# EAGLE board TamaCollar1 Mk1 PCB v58 (EAGLE 9.7.0)
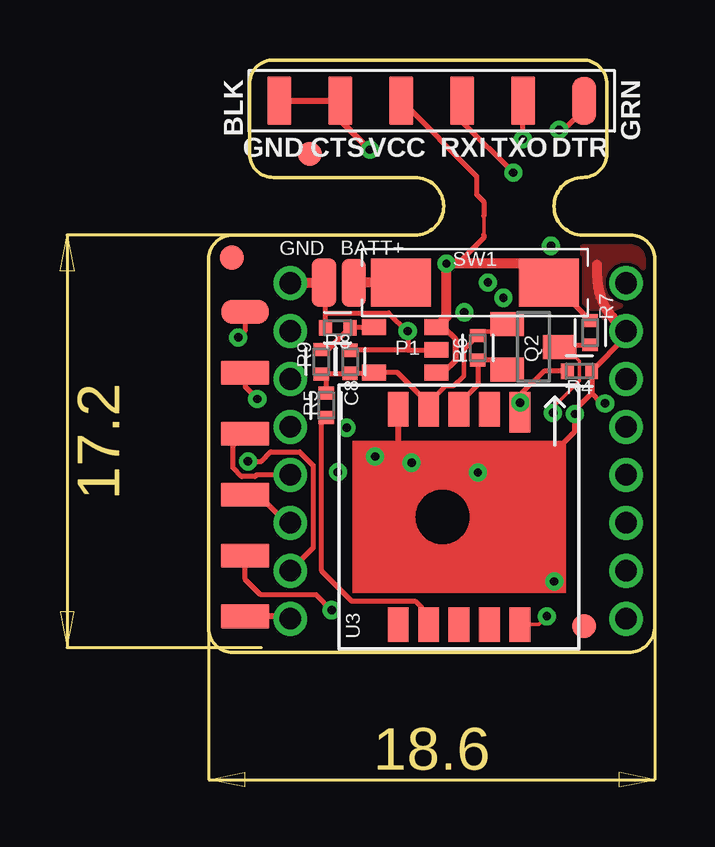
[diagram p0: board, top side]
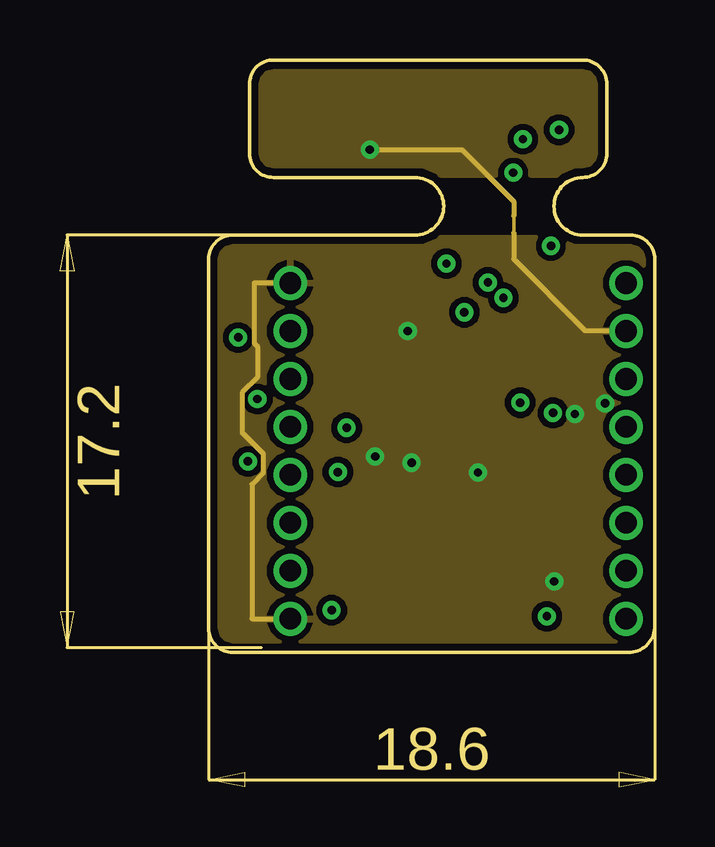
[diagram p1: board, inner layer Route2]
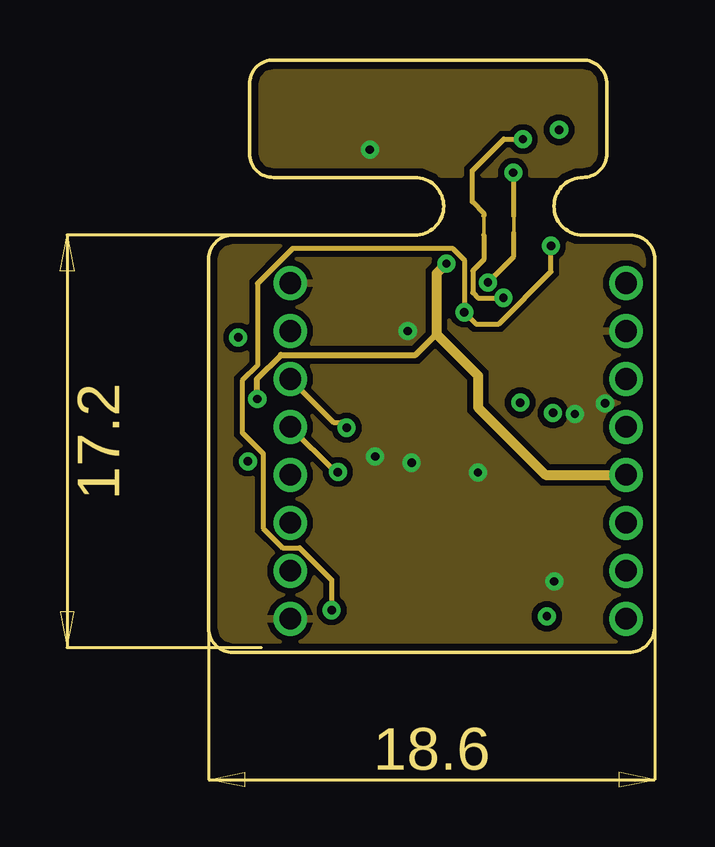
[diagram p2: board, inner layer Route15]
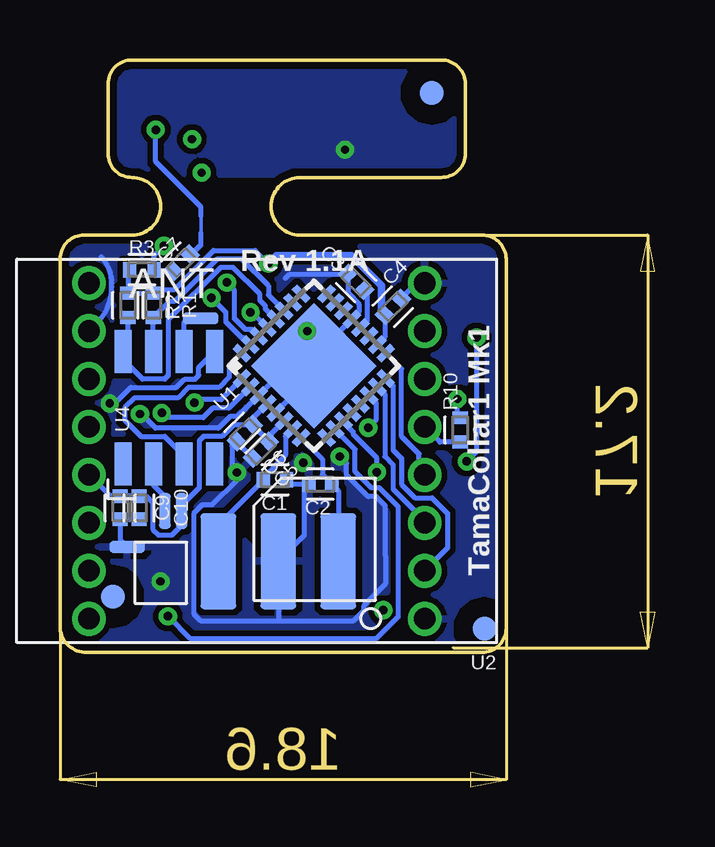
[diagram p3: board, bottom side, seen from below]

Size 18.6 x 24.7 mm. Coordinates in mm from the lower left corner, seen from the top.
Outline: 17.6,17.4 arc-90 18.6,16.4 18.6,1.2 arc-90 17.6,0 2.2,0 1,0 arc-90 0,1 0,16.4 arc-90 1,17.4 2.2,17.4 8.6,17.4 arc90 9.8,18.6 arc90 8.6,19.8 2.7,19.8 arc-90 1.7,20.8 1.7,23.7 arc-90 2.7,24.7 15.6,24.7 arc-90 16.6,23.7 16.6,20.8 arc-90 15.6,19.8 arc90 14.4,18.6 arc90 15.6,17.4 17.6,17.4
Copper layers (1+2*15+16): Top 0.035mm / dielectric 0.12mm / Route2 0.035mm / dielectric 1.165mm / Route15 0.035mm / dielectric 0.12mm / Bottom 0.035mm
Design rules "LionCircuits(4_Layer)": minimum track width 6mil, minimum drill 0.35mm, track to track 6mil, track to pad 6mil, pad to pad 6mil, via to via 6mil, smd to smd 6mil, copper to edge 12mil, drill to drill 12mil, minimum pad ring 10mil, minimum via ring 8mil, stop-mask expansion 0.05mm, vias tented up to drill 0.4mm, thermal gap 10mil

## Footprints (pad centres in the part's own frame; a part is rotated, then mirrored left to right if it is on the bottom)
BREAKOUT_PAD*1*1X2MM = smd 2 x 1: P$1 0,0
CAPC1005X60 = smd 0.56 x 0.629: 1 -0.485,0; 2 0.485,0
FIDUCIAL_1MM = smd 1 x 1: 1 0,0
FTDI_DEVICE_SMD = smd 1 x 2: P1 -6.35,0; P2 -3.81,0; P3 -1.27,0; P4 1.27,0; P5 3.81,0; P6 6.35,0
1X6-THT = smd 1 x 2: P1 -6.35,0; P2 -3.81,0; P3 -1.27,0; P4 1.27,0; P5 3.81,0; P6 6.35,0
MIC5205 = smd 0.66 x 1: 1 0.95,1.3; 2 0,1.3; 3 -0.95,1.3; 4 -0.95,-1.3; 5 0.95,-1.3
RESONATOR_4MHZ = smd 1.5 x 4: A -2.5,0; B 0,0; C 2.5,0
SOT23 = smd 1 x 1.4: 1 -0.95,-1.1; 2 0.95,-1.1; 3 0,1.1
RESC1005X40 = smd 0.535 x 0.644: 1 -0.507,0; 2 0.507,0
BREAKOUT_PAD*1*0.5X1.5MM = smd 1.5 x 0.5: P$1 0,0
REED_CT05 = smd 2.5 x 2: P1 -3.08,0; P2 3.08,0
QFN32_5X5_0.50 = smd 0.8 x 0.3: 1 -2.5,1.75; 2 -2.5,1.25; 3 -2.5,0.75; 4 -2.5,0.25; 5 -2.5,-0.25; 6 -2.5,-0.75; 7 -2.5,-1.25; 8 -2.5,-1.75; 17 2.5,-1.75; 18 2.5,-1.25; 19 2.5,-0.75; 20 2.5,-0.25; 21 2.5,0.25; 22 2.5,0.75; 23 2.5,1.25; 24 2.5,1.75 | smd 0.3 x 0.8: 9 -1.75,-2.5; 10 -1.25,-2.5; 11 -0.75,-2.5; 12 -0.25,-2.5; 13 0.25,-2.5; 14 0.75,-2.5; 15 1.25,-2.5; 16 1.75,-2.5; 25 1.75,2.5; 26 1.25,2.5; 27 0.75,2.5; 28 0.25,2.5; 29 -0.25,2.5; 30 -0.75,2.5; 31 -1.25,2.5; 32 -1.75,2.5 | smd 3.7 x 3.7: EXP 0,0
LORA_RFM95W-915S2_16STANDOFFMODULE = drill 0.9: PH1 -7,7; PH2 -7,5; PH3 -7,3; PH4 -7,1; PH5 -7,-1; PH6 -7,-3; PH7 -7,-5; PH8 -7,-7; PH9 7,-7; PH10 7,-5; PH11 7,-3; PH12 7,-1; PH13 7,1; PH14 7,3; PH15 7,5; PH16 7,7
ORG1411 = smd 1.676 x 0.864: P1 4.362,-2.54 | smd 1.422 x 0.864: P2 4.489,-1.27; P3 4.489,0; P4 4.489,1.27; P5 4.489,2.54; P6 -4.489,2.54; P7 -4.489,1.27; P8 -4.489,0; P9 -4.489,-1.27; P10 -4.489,-2.54
DS3231MZ+_SOIC8 = smd 1.78 x 0.72: P1 -2.34,1.905; P2 -2.34,0.635; P3 -2.34,-0.635; P4 -2.34,-1.905; P5 2.34,-1.905; P6 2.34,-0.635; P7 2.34,0.635; P8 2.34,1.905

## Placement (x,y rotation side)
BATT+  BREAKOUT_PADL  [BREAKOUT_PAD*1*1X2MM]  6.05,15.41 90 top
C1  10pF  [CAPC1005X60]  9.64,7.2 180 bottom
C2  10pF  [CAPC1005X60]  7.75,7.01 0 bottom
C3  0.1uF  [CAPC1005X60]  6.26,15.45 315 bottom
C4  0.1uF  [CAPC1005X60]  4.72,14.41 45 bottom
C5  0.1uF  [CAPC1005X60]  10.22,8.44 225 bottom
C6  0.1uF  [CAPC1005X60]  10.9,9.15 225 bottom
C7  0.1uF  [CAPC1005X60]  13.53,16.25 45 bottom
C8  2.2uF  [CAPC1005X60]  5.9,12.12 270 top
C9  0.1uF  [CAPC1005X60]  16.09,6.03 270 bottom
C10  0.1uF  [CAPC1005X60]  15.31,6.03 270 bottom
F1  FIDUCIAL  [FIDUCIAL_1MM]  15.66,1.09 0 top
F2  FIDUCIAL  [FIDUCIAL_1MM]  4.21,20.78 0 top
F3  FIDUCIAL  [FIDUCIAL_1MM]  0.97,16.46 0 top
F4  FIDUCIAL  [FIDUCIAL_1MM]  16.39,2.33 0 bottom
F5  FIDUCIAL  [FIDUCIAL_1MM]  0.9,0.99 0 bottom
F6  FIDUCIAL  [FIDUCIAL_1MM]  3.1,23.32 0 bottom
GND  BREAKOUT_PADL  [BREAKOUT_PAD*1*1X2MM]  4.81,15.42 90 top
JP1  FTDI_DEVICESMD  [FTDI_DEVICE_SMD]  9.3,23 180 top
JP2  AVR_SPI_PRG_61X6_THT  [1X6-THT]  1.52,7.85 270 top
P1  LDO_MIC5205YM5  [MIC5205]  8.2,12.62 270 top
Q1  RESONATOR_4MHZ  [RESONATOR_4MHZ]  9.5,3.8 0 bottom
Q2  NMOSFET  [SOT23]  13.54,12.74 270 top
R1  4.7k  [RESC1005X40]  14.71,14.47 270 bottom
R2  4.7k  [RESC1005X40]  15.76,14.47 270 bottom
R3  10k  [RESC1005X40]  15.19,15.96 0 bottom
R4  10k  [RESC1005X40]  15.46,11.73 0 top
R5  10k  [RESC1005X40]  4.9,10.3 270 top
R6  10k  [RESC1005X40]  11.22,12.7 90 top
R7  10k  [RESC1005X40]  15.91,13.33 90 top
R8  10k  [RESC1005X40]  5.38,13.54 180 top
R9  22k  [RESC1005X40]  4.7,12.12 270 top
R10  10k  [RESC1005X40]  1.91,9.28 270 bottom
RTC1  BREAKOUT_PADS  [BREAKOUT_PAD*1*0.5X1.5MM]  12.74,13.93 0 bottom
RTC2  BREAKOUT_PADS  [BREAKOUT_PAD*1*0.5X1.5MM]  14.23,5.9 90 bottom
RTC3V3  BREAKOUT_PADS  [BREAKOUT_PAD*1*0.5X1.5MM]  13.53,5.9 270 bottom
RTCGND  BREAKOUT_PADS  [BREAKOUT_PAD*1*0.5X1.5MM]  15.8,4.4 0 bottom
SW1  REED_SWITCH  [REED_CT05]  11.1,15.42 0 top
U1  ATMEGA328P-MU  [QFN32_5X5_0.50]  8.02,11.95 45 bottom
U2  LORA_RFM95W-915S2_MODULETHT  [LORA_RFM95W-915S2_16STANDOFFMODULE]  10.4,8.4 180 bottom
U3  GPS_ORG1411  [ORG1411]  10.44,5.65 90 top
U4  DS3231MZ+  [DS3231MZ+_SOIC8]  14.06,10.2 90 bottom

## Library data of the parts
BATT+ F1-F6 GND JP1 JP2 Q1 RTC1 RTC2 RTC3V3 RTCGND SW1 U3 = CDC Library
C1 C2 = Capacitor; CATEGORY: Capacitor; LINK: https://www.evelta.com/10-pf-50v-0402-smd-multilayer-ceramic-capacitors-cc0402jrnpo9bn100-yageo/
C3-C7 C9 C10 = Capacitor; CATEGORY: Capacitor; LINK: https://www.evelta.com/100-nf-25v-0402-smd-multi-layer-ceramic-capacitor-0402x104k250ct-walsin/
C8 = Capacitor; CATEGORY: Capacitor; LINK: https://www.comkey.in/passive-components/capacitors/0402x225m6r3ct
P1 = CDC Library; LINK: https://www.digikey.in/en/products/detail/texas-instruments/TPS7A0318DBVR/13535534
Q2 = Transistor; CATEGORY: Transistor; LINK: https://www.evelta.com/bss138lt1g-50v-220ma-n-channel-transistor-surface-mount-sot-23-3/; SUB-CATEGORY: MOSFET; TYPE: N-Channel
R1 R2 = Resistor; CATEGORY: Resistor; LINK: https://www.evelta.com/4-7k-1-0402-smd-thick-film-chip-resistor-royal-ohm-0402wgf4701tce/; SUB-CATEGORY: Fixed
R3-R8 R10 = Resistor; CATEGORY: Resistor; LINK: https://www.evelta.com/10k-1-0402-smd-thick-film-chip-resistor-royal-ohm-0402wgf1002tce/; SUB-CATEGORY: Fixed
R9 = Resistor; CATEGORY: Resistor; LINK: https://www.evelta.com/22k-1-0402-smd-thick-film-chip-resistor-royal-ohm-0402wgf2202tce/; SUB-CATEGORY: Fixed
U1 = CDC Library; LINK: https://www.rhydolabz.com/components-microcontrollers-c-172_192/atmega328pmu-smd-p-2612.html
U2 = CDC Library; LINK: https://www.digikey.in/product-detail/en/rf-solutions/RFM95W-915S2/RFM95W-915S2-ND/6564923
U4 = CDC Library; LINK: https://www.evelta.com/ds3231mz-maxim-integrated-alarm-rtc-i2c-2-3-v-to-5-5-v/

## Nets
+1.8V [Power]: C8.2 P1.5 Q2.1 R5.1 R6.2 R9.2 U3.P4
+3.3V [Power]: C4.1 C5.1 C6.1 C9.1 C10.1 JP1.P4 JP2.P2 P1.1 P1.3 R1.1 R2.1 R3.1 R7.2 R10.1 RTC3V3.P$1 SW1.P2 U1.4 U1.6 U1.18 U2.PH13
+BATT [Power]: BATT+.P$1 SW1.P1
AREF: C3.2 U1.20
CS_LR: R10.2 U1.11 U2.PH5
DTR: C7.2 JP1.P1
GND [Power]: C1.1 C2.1 C3.1 C4.2 C5.2 C6.2 C8.1 C9.2 C10.2 GND.P$1 JP1.P5 JP1.P6 JP2.P6 P1.2 Q1.B R4.2 R8.2 RTCGND.P$1 U1.3 U1.5 U1.21 U1.EXP U2.PH1 U2.PH8 U2.PH10 U3.P5 U4.P5
GPS_CTS: R5.2 U3.P7
GPS_EN: R4.1 U1.1 U3.P1
GPS_RX: U1.10 U3.P10
GPS_TX18: Q2.2 R6.1 U3.P3
GPS_TX33: Q2.3 R7.1 U1.2
INT0: U1.32 U4.P3
LR_ANT [RF]: U2.PH9
MISO: JP2.P1 U1.16 U2.PH2
MOSI: JP2.P4 U1.15 U2.PH3
P1ADJ [Power]: P1.4 R8.1 R9.1
Q1: C1.2 Q1.A U1.7
Q2: C2.2 Q1.C U1.8
RESET_LR: U1.14 U2.PH6
RST: C7.1 JP2.P5 R3.2 U1.29
RTCVBAT: RTC1.P$1 U4.P6
RTCVCC: RTC2.P$1 U4.P2
RXD: JP1.P3 U1.30
SCK: JP2.P3 U1.17 U2.PH4
SCL: R2.2 U1.28 U4.P8
SDA: R1.2 U1.27 U4.P7
TXD: JP1.P2 U1.31

## Tracks (layer width: path | path; a pad name or v marks a point on that pad's centre or on a via)
+1.8V
  Top 0.18: 9.17,10.4 9.87,11.1 10.21,11.1 10.65,11.53 10.65,12.64 R6.2 11.38,13.37 11.88,13.37 12.32,13.81 Q2.1
  Top 0.2: R5.1 4.9,11.41 R9.2 5.88,11.61 C8.2 6.87,11.63 P1.5 7.87,11.67 9.17,10.37 U3.P4 9.17,10.4
+3.3V  (via drill 0.35)
  Top 0.152: 11.48,18.2 11.48,17.4
  Top 0.2: 9.74,11.67 P1.1 | P1.3 9.74,13.57 | R7.2 14.33,15.42 SW1.P2 13.39,16.21 | v9.91,16.21 10.4,16.21 11.48,17.29 11.48,17.4 | 11.48,18.2 11.48,18.8 11.17,19.11 11.17,19.86 JP1.P4 | JP2.P2 1.52,11.08 v2.03,10.57
  Top 0.254: 9.74,13.57 9.78,13.57 10.28,13.07 10.28,12.17 9.78,11.67 9.74,11.67
  Top 0.406: P1.3 9.91,13.98 v9.91,16.21 13.39,16.21
  Route15 0.254: v2.03,10.57 2,10.6 2,11.39 3.01,12.4 8.63,12.4 9.5,13.27
  Route15 0.406: U2.PH13 14.04,7.4 11.23,10.21 11.23,11.54 9.5,13.27 9.5,15.8 v9.91,16.21
  Bottom 0.2: U1.18 5.06,13.14 C4.1 | R3.1 15.76,15.89 R2.1 R1.1 14.56,15.13 13.83,15.13 12.2,16.76 10.46,16.76 v9.91,16.21 | U2.PH13 16.52,6.51 C9.1 C10.1 15.01,6.51 14.73,6.24 14.73,5.13 14.5,4.9 13.93,4.9 13.53,5.3 RTC3V3.P$1 13.53,6.12 12.8,6.85 12.8,8.82 12.62,9 11.85,9 11.37,9.48 10.57,9.48 C6.1 | U1.6 9.78,9.13 9.78,8.89 C5.1 10.56,9.46 C6.1 | U1.4 10.56,9.77 C6.1 | R10.1 2.03,9.9 v2.03,10.57
  Bottom 0.305: C4.1 5.19,14.2 5.19,15.29 6.45,16.55 9.58,16.55 v9.91,16.21
+BATT
  Top 0.2: SW1.P1
  Top 0.406: SW1.P1 BATT+.P$1
AREF
  Bottom 0.2: C3.2 5.92,15.04 5.79,14.91 5.79,13.83 U1.20
CS_LR  (via drill 0.35)
  Route15 0.2: v5.39,7.52 5.28,7.52 U2.PH5
  Bottom 0.2: v5.39,7.52 5.41,7.54 5.41,8.13 6.38,9.11 6.38,9.19 6.78,9.59 U1.11 | R10.2 2.77,8.77 U2.PH5
DTR  (via drill 0.35)
  Top 0.2: v14.61,21.79 14.81,21.79 15.65,22.63 JP1.P1
  Bottom 0.152: 12.73,17.5 12.73,18.2
  Bottom 0.2: 12.73,18.2 12.73,18.57 14.61,20.46 v14.61,21.79 | C7.2 13.13,16.59 12.73,17 12.73,17.5
GND  (via drill 0.35)
  Top 0.2: P1.2 9.48,12.61 8.3,12.61 | 8.3,12.61 C8.1 | 4.87,14.15 4.87,15.36 GND.P$1 | 8.3,12.61 8.3,13.36 7.5,14.15 4.87,14.15 | 14.41,8.35 15.27,9.21 15.27,10.12 | 15.97,10.81 R4.2 17.4,13.16 U2.PH10 | 15.97,10.81 15.27,10.12 | v16.53,10.38 16.4,10.38 15.97,10.81 | 15.27,10.12 15.27,10.11 v15.27,9.94 | R8.2 4.87,14.15
  Top 0.254: U3.P5 7.9,8.47 v8.46,7.91 | U2.PH1 3.3,1.5 JP2.P6 | JP1.P6 JP1.P5 5.49,22.17 6.7,20.96 v6.72,20.96
  Top 0.406: U2.PH10 16.94,13.86 arc-45 16.2,15.65 16.2,16.16 | GND.P$1 4.79,15.4 U2.PH8
  Route2 0.152: 12.73,18.2 12.73,17.5
  Route2 0.2: U2.PH10 15.7,13.4 12.73,16.4 12.73,17.5 | 12.73,18.2 12.73,18.8 10.57,20.96 v6.72,20.96 | U2.PH8 1.9,15.4 1.9,12.89 2.03,12.76 2.03,11.46 1.4,10.83 1.4,9.16 2.27,8.29 2.27,7.48 1.8,7.01 1.8,1.4 U2.PH1
  Bottom 0.2: 9.7,10.01 U1.5 8.02,11.6 U1.EXP | U1.EXP 8.02,12.3 U1.21 6.14,14.18 6.14,14.53 6.6,14.99 C3.1 6.62,15.77 9.03,15.77 9.2,15.6 | U1.EXP 9.08,11.95 U1.3 11.2,9.83 11.52,9.83 12,9.36 14.62,9.36 15.21,9.94 v15.27,9.94 | C5.2 11.24,8.78 C6.2 11.44,8.62 11.44,7.71 v11.23,7.5 11.23,7.18 12.25,6.16 12.66,6.16 13,5.82 13,1.58 12.71,1.29 9.5,1.29 | 5.03,4.04 5.03,6.11 5.42,6.5 5.76,6.5 6.65,7.39 6.65,7.88 v6.94,8.17 | 5.04,4.04 5.03,4.04 | C10.2 C9.2 16.09,4.69 RTCGND.P$1 | C4.2 3.73,15.4 U2.PH8 | U2.PH10 17.06,13.74 arc-45 16.44,15.24 16.44,15.39 arc-45 16.9,16.5 | v16.53,10.38 16.32,10.38 15.66,11.04 13.75,11.04 13.4,11.4 12.96,11.4 12.82,11.54 12.82,11.88 U4.P5 | 5.03,4.04 5.03,2.85 5.95,1.94 5.95,1.74 6.39,1.29 9.5,1.29 | 9.5,1.29 Q1.B 8.41,4.89 8.41,6.83 C2.1 8.96,7.01 C1.1
  other vias: 14.41,2.96 8.3,13.4
  pour Route15 (isolate 0.254): 1,0 18.1,0 arc90 18.6,0.5 18.6,23.7 arc90 17.6,24.7 1.6,24.7 arc90 0,23.1 0,1 arc90
  pour Route2 (isolate 0.254): 1,0 17.9,0 arc90 18.6,0.7 18.6,23.7 arc90 17.6,24.7 1.6,24.7 arc90 0,23.1 0,1 arc90
  pour Bottom (isolate 0.254): 1,0 18.4,0 arc90 18.6,0.2 18.6,23.7 arc90 17.6,24.7 1.6,24.7 arc90 0,23.1 0,1 arc90
  pour Top: 15.5,17.4 15.5,14.5 16.9,13.1 18.2,13.1 18.5,13.4 18.5,17 18.1,17.4
GPS_CTS
  Top 0.2: U3.P7 9.17,1.57 8.6,2.14 5.96,2.14 4.71,3.39 4.71,9.6 R5.2
GPS_EN  (via drill 0.35)
  Top 0.2: 12.99,10.73 12.98,10.72 U3.P1 | R4.1 13.99,11.73 12.99,10.73 | v12.99,10.41 v12.99,10.42 12.99,10.73
  Bottom 0.2: U1.1 11.02,11.39 11.88,10.54 12.8,10.54 12.92,10.41 v12.99,10.41
GPS_RX  (via drill 0.35)
  Top 0.152: U3.P10 13.76,1.16 v14.1,1.5
  Bottom 0.2: U1.10 6.3,8.46 6.3,7.54 5.62,6.86 5.29,6.86 4.5,6.07 4.5,1.5 5.4,0.59 13.2,0.59 v14.1,1.5
GPS_TX18
  Top 0.2: Q2.2 12.06,12.19 R6.1 11.22,11.15 10.44,10.37 U3.P3
GPS_TX33  (via drill 0.35)
  Top 0.152: Q2.3 14.86,12.74 15.45,12.15 15.45,11.31 14.38,10.24 14.38,10 v14.36,9.98
  Top 0.2: Q2.3 14.72,12.82 R7.1
  Bottom 0.2: U1.2 11.55,10.19 12.23,10.19 12.63,9.78 14.16,9.78 v14.36,9.98
INT0
  Bottom 0.2: U1.32 11.55,11.96 11.55,11.48 11.98,11.04 13.25,11.04 13.68,10.62 15.48,10.62 15.9,10.2 15.9,9.68 15.22,9 14.23,9 13.43,8.2 U4.P3
MISO  (via drill 0.35)
  Top 0.2: U2.PH2 4.36,4.36 4.36,7.8 3.8,8.36 2.59,8.36 2.2,7.96 v1.64,7.96 | JP2.P1 1.52,13.42 v1.23,13.13
  Bottom 0.2: U2.PH2 2.44,4.36 2.44,5.8 3.09,6.44 3.8,6.44 4.36,7 4.36,8.09 4.71,8.44 4.71,11.11 U1.16 | v1.23,13.13 1.23,8.37 v1.64,7.96
MOSI
  Top 0.2: U2.PH3 3.25,5.4 2.07,6.58 JP2.P4
  Bottom 0.2: U1.15 5.06,10.76 5.06,8.16 4.71,7.81 4.71,6.81 3.4,5.5 U2.PH3
P1ADJ
  Top 0.2: R9.1 4.97,12.63 5.48,13.14 R8.1 6.87,13.54 P1.4
Q1
  Bottom 0.2: U1.7 9.2,9 9.2,8.22 10.12,7.3 C1.2 12,5.33 Q1.A
Q2
  Bottom 0.2: U1.8 7.67,8.06 7.67,7.41 C2.2 7,6.75 Q1.C
RESET_LR  (via drill 0.35)
  Route15 0.2: U2.PH6 5.21,9.59 5.53,9.59 v5.75,9.37
  Bottom 0.2: U1.14 5.43,10.43 5.43,9.68 v5.75,9.37
RST  (via drill 0.35)
  Top 0.2: v5.13,1.76 4.49,2.4 2.17,2.4 1.52,3.05 JP2.P5
  Route15 0.2: v14.27,16.95 14.27,15.87 12.1,13.7 11.14,13.7 v10.66,14.18 10.66,16.36 10.18,16.84 3.49,16.84 2.03,15.38 2.03,11.96 1.4,11.33 1.4,9.16 2.27,8.29 2.27,5.18 3.09,4.36 3.8,4.36 5.13,3.02 v5.13,1.76
  Bottom 0.2: U1.29 10.5,14.08 10.56,14.08 v10.66,14.18 | C7.1 14.63,15.91 R3.2 14.68,16.54 v14.27,16.95
RTCVBAT
  Bottom 0.2: U4.P6 13.43,13.74 13.24,13.93 RTC1.P$1
RTCVCC
  Bottom 0.2: RTC2.P$1 14.23,6.49 14.7,6.96 U4.P2
RXD  (via drill 0.35)
  Top 0.2: JP1.P3 10.57,22.13 v12.7,20
  Route15 0.152: 12.73,17.5 12.73,18.2
  Route15 0.2: v11.64,15.42 12.73,16.5 12.73,17.5 | 12.73,18.2 12.73,19.98 v12.7,20
  Bottom 0.2: U1.30 10.61,13.48 10.89,13.48 11.33,13.91 11.33,15.11 v11.64,15.42
SCK
  Top 0.2: JP2.P3 1.01,8.61 1.01,7.7 1.38,7.33 1.93,7.33 2,7.4 U2.PH4
  Bottom 0.2: U1.17 4.36,11.82 4.36,9 3.63,8.28 3.63,7.63 U2.PH4
SCL
  Bottom 0.2: R2.2 15.76,12.74 U4.P8 15.97,12.2 15.16,11.4 14.23,11.4 14.09,11.54 14.09,13.88 11.91,16.05 11.38,16.05 10.27,14.94 10.27,14.68 10.03,14.44 10.03,14.31 U1.28
SDA
  Bottom 0.2: U4.P7 14.71,12.55 R1.2 14.04,14.63 13.82,14.63 12.05,16.41 11.04,16.41 9.91,15.28 9.91,14.9 U1.27
TXD  (via drill 0.35)
  Top 0.2: v13.1,21.4 JP1.P2
  Route15 0.152: 11.48,18.2 11.48,17.4
  Route15 0.2: v12.29,14.78 11.23,14.78 11.02,15 11.02,15.91 11.48,16.38 11.48,17.4 | 11.48,18.2 11.48,18.3 10.99,18.79 10.99,20.09 12.3,21.4 v13.1,21.4
  Bottom 0.2: U1.31 10.96,13.12 11.04,13.12 11.68,13.77 11.68,14.17 v12.29,14.78
(copper drawn outside any net)
  shapes: Bottom area x1, Route15 area x1, Route2 area x1

## Text on the board
bNames: Rev 1.1A | TamaCollar1 Mk1
Document: Do not populate LR ANT | MIS / 3v3 / SCK / MOSI / RST / GND